# Altium PCB rl78l1a_smart_blood_pressure_monitor_pcb.PcbDoc
Units mm, origin at the board's own origin, x right, y up, seen from the top; angles counter-clockwise.
Board outline 98.42 x 85.72 mm, 2 copper layers (Top Layer, Bottom Layer); 60 components, 54 nets, 280 pads, 29 vias.
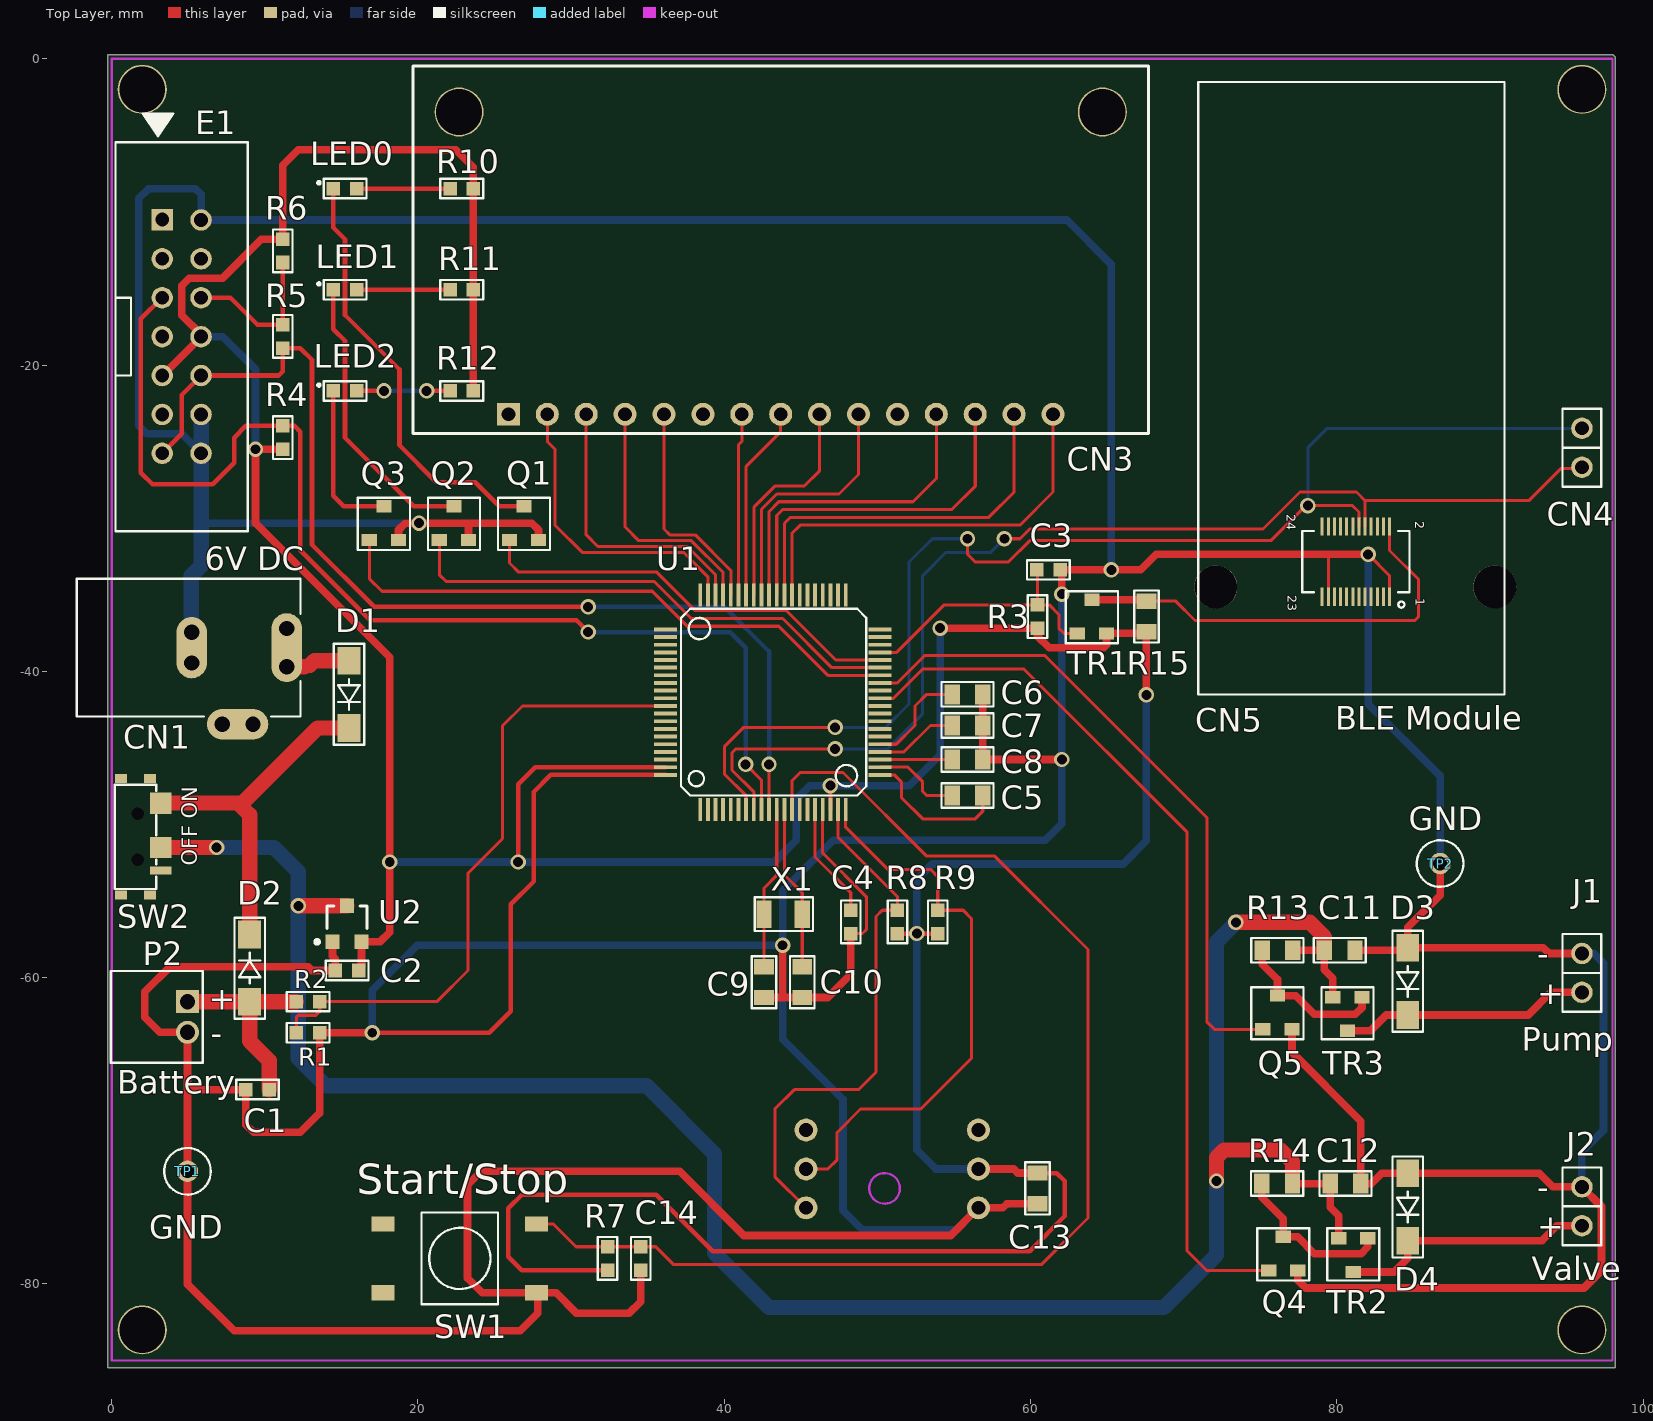
[diagram p0: Top Layer view]
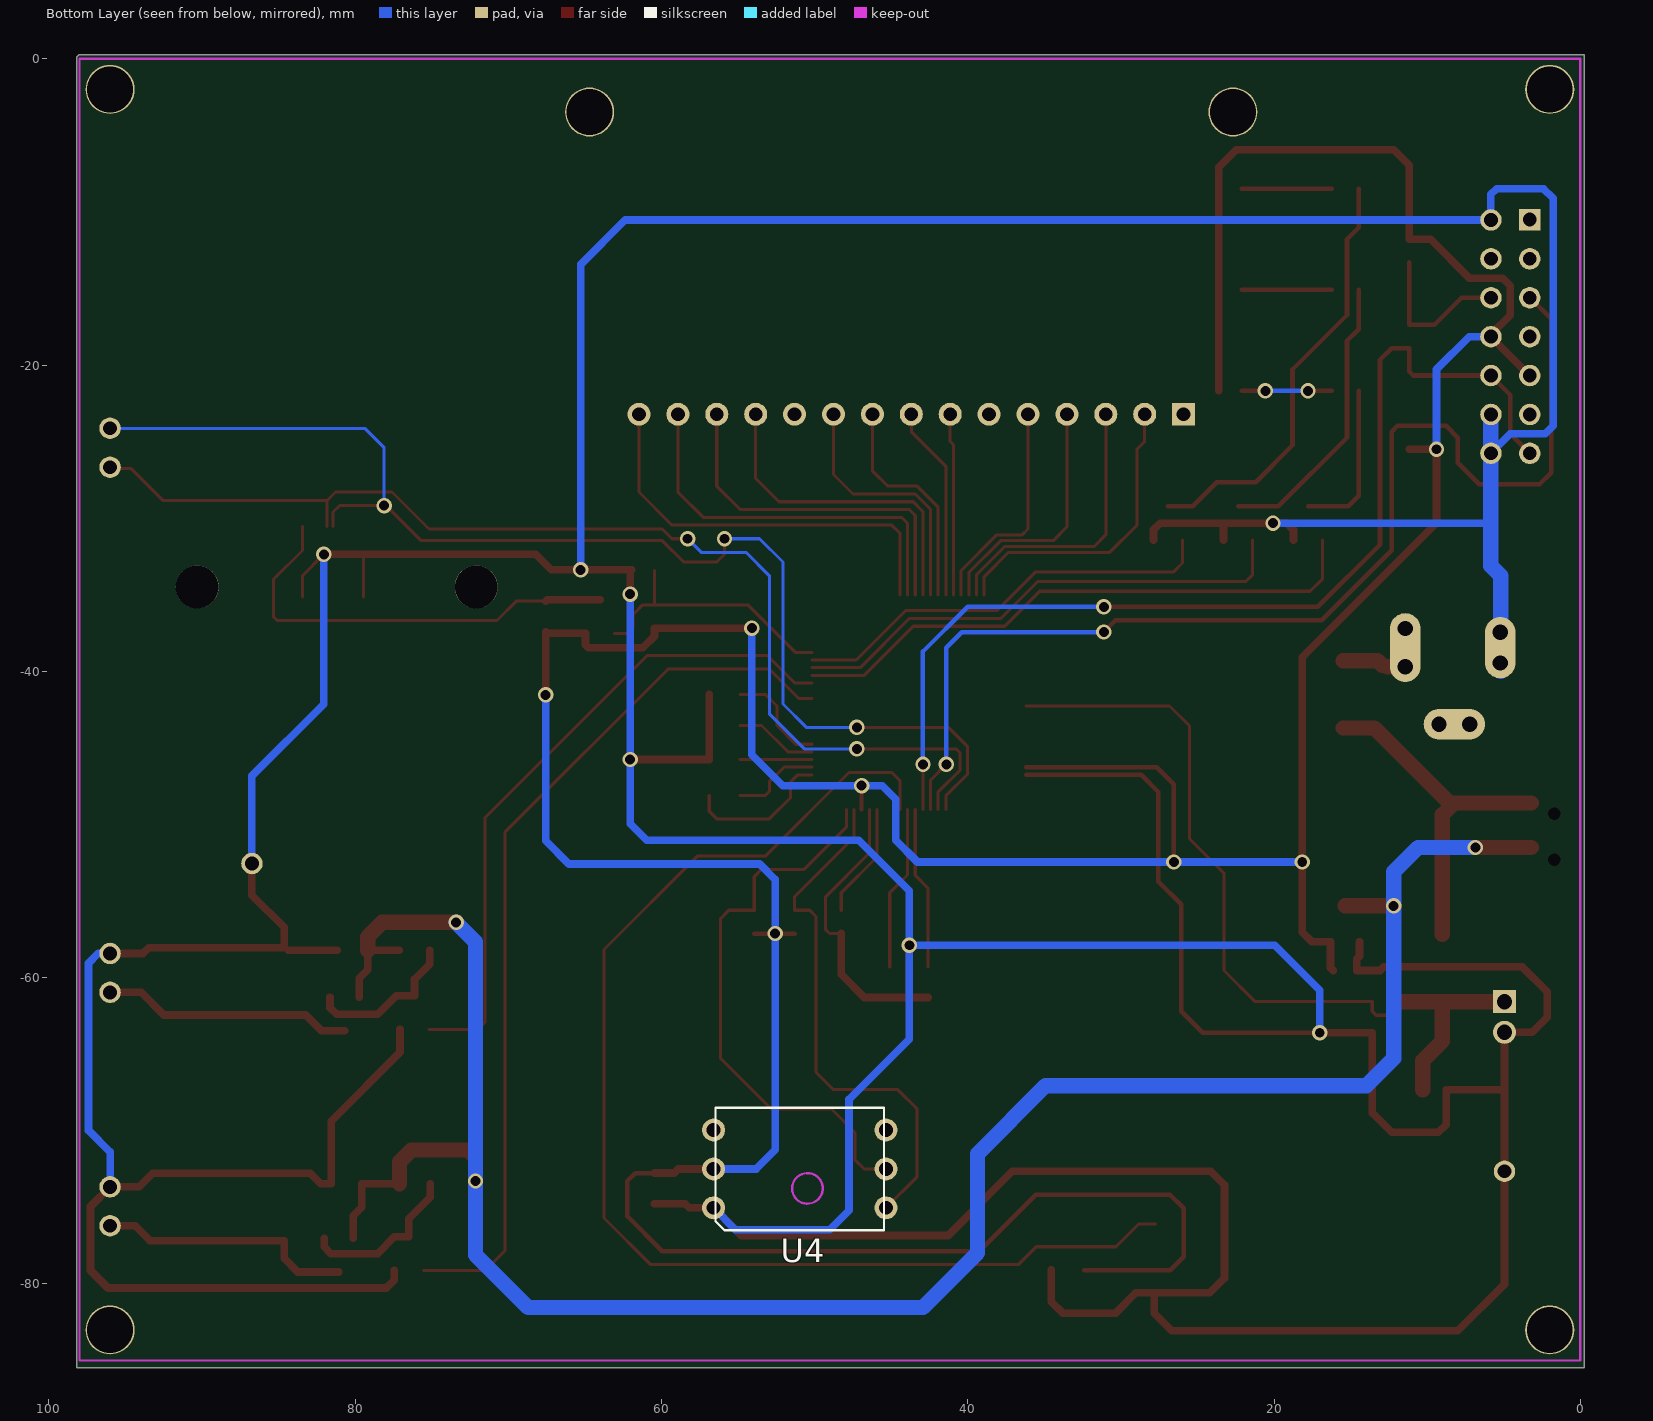
[diagram p1: Bottom Layer view, seen from below]

## Layer stack, top to bottom
Top Layer: signal copper 0.0356
Dielectric: dielectric 0.32, FR-4, Dk 4.8
Bottom Layer: signal copper 0.0356

## Board outline
-0.254,0 -0.254,-85.471 98.171,-85.471 98.171,-73.152 98.171,0.127 98.044,0.254 62.103,0.254 -0.254,0.254 -0.254,0

## Design rules (kind name [scope] priority, off if disabled: settings)
Clearance [All] p1: gap=0.15
ComponentClearance [All] p1: gap=0.254 collisioncheckmode=3 verticalgap=0.254
HoleSize [All] p1: absolutevalues=TRUE maxlimit=5 minlimit=0.025 maxpercent=80.000 minpercent=20.000
PolygonConnect [All] p1: connectstyle=Relief reliefconductorwidth=0.254 reliefentries=4 polygonreliefangle="90 Angle"
RoutingVias [All] p1: holewidth=0.65 width=1 viastyle="Through Hole" minholewidth=0.65 minwidth=1 maxholewidth=1 maxwidth=2
SolderMaskExpansion [All] p1: expansion=0.102
TestPointUsage [All] p1: valid=0 allowmultiple=FALSE
Testpoint [All] p1: side=15 testpointundercomponent=TRUE minsize=1.016 maxsize=2.54 preferedsize=1.524 minholesize=0 maxholesize=1.016 preferedholesize=0.813 testpointgrid=0.025 style=1023 order=0-112345678
Width [All] p1: maxlimit=1 minlimit=0.15 preferedwidth=0.254 toplayer_prefwidth=0.2 bottomlayer_prefwidth=0.2 minimp=50.000000 maximp=50.000000 favimp=50.000000
17 further rules are at their usual default settings.

## Classes and differential pairs
component class "Blood_Pressure_Monitor Sheet1": C1 C2 C3 C4 C5 C6 C7 C8 C9 C10 C14 CN1 D1 D2 E1 P2 R1 R2 R3 R4 R5 R6 R7 R8 R9 SW1 SW2 TR1 U1 U2 X1
component class "Blood_Pressure_Monitor Sheet2": C11 C12 C13 CN2 CN3 CN4 CN5 D3 D4 J1 J2 LED0 LED1 LED2 Q1 Q2 Q3 Q4 Q5 R10 R11 R12 R13 R14 R15 TP1 TP2 TP3 TP11 TP12 TR2 TR3 U4

## Components (designator, comment, footprint, x,y, rotation, side; value= is the part's Value field where it differs from the comment)
C1 "1uF" 0603 9.525,-67.31 r180 top
C2 "1uF" 0603 15.373,-59.534 r180 top
C3 "1uF" 0603 61.168,-33.372 r0 top
C4 "1uF" 0603 48.26,-56.359 r270 top
C5 "1uF" 0805 55.88,-48.104 r180 top
C6 "0.47uF" 0805 55.88,-41.5 r0 top
C7 "0.47uF" 0805 55.88,-43.532 r0 top
C8 "0.47uF" 0805 55.88,-45.758 r0 top
C9 "22pF" 0805 42.592,-60.296 r90 top
C10 "22pF" 0805 45.092,-60.296 r90 top
C11 "0.1uF" 0805 80.184,-58.207 r0 top
C12 "0.1uF" 0805 80.565,-73.447 r0 top
C13 "0.1uF" 0805 60.452,-73.758 r270 top
C14 "1uF" 0603 34.544,-78.33 r90 top
CN1 "DC IN" "POWER IN A" 11.43,-38.452 r0 top
CN3 "LCD 4x8" "LCD 4X8" 25.908,-23.212 r0 top
CN4 "CON 2PIN A" "JMP-2 A" 96,-25.4 r0 top
CN5 "Coaxial connector" "CRS5001 - 24" 90.932,-41.5 r270 top locked
D1 "1SS14" D1N 15.494,-41.5 r270 top
D2 "1SS14" D1N 9.017,-59.382 r90 top
D3 "1SS404" D1N 84.629,-60.239 r270 top
D4 "1SS404" D1N 84.629,-74.971 r270 top
E1 "CN2" "E8 Connect" 4.572,-18.132 r0 top
J1 "JMP 2PIN" "JMP-2 A" 96,-59.69 r0 top
J2 "JMP 2PIN" "JMP-2 A" 96,-74.93 r0 top
LED0 "" "LED 0603" 15.24,-8.48 r180 top
LED1 "" "LED 0603" 15.24,-15.084 r180 top
LED2 "" "LED 0603" 15.24,-21.688 r180 top
P2 "BAT AAAx4" CON-2MM-2 4.953,-61.566 r270 top
Q1 "DTC114" "SOT-23-3 A" 26.924,-30.324 r0 top
Q2 "DTC114" "SOT-23-3 A" 22.352,-30.324 r0 top
Q3 "DTC114" "SOT-23-3 A" 17.78,-30.324 r0 top
Q4 "DTC114" "SOT-23-3 A" 76.501,-78.019 r0 top
Q5 "DTC114" "SOT-23-3 A" 76.12,-62.271 r0 top
R1 "100K" 0603 12.827,-63.598 r0 top
R2 "100K" 0603 12.827,-61.566 r0 top
R3 "10K" 0603 60.452,-36.42 r90 top
R4 "1K" 0603 11.176,-24.736 r90 top
R5 "10K" 0603 11.176,-18.132 r90 top
R6 "1K" 0603 11.176,-12.544 r90 top
R7 "10K" 0603 32.385,-78.33 r90 top
R8 "4.7K" 0603 53.94,-56.359 r90 top
R9 "4.7K" 0603 51.308,-56.359 r90 top
R10 "1K" 0603 22.86,-8.48 r0 top
R11 "1K" 0603 22.86,-15.084 r0 top
R12 "1K" 0603 22.86,-21.688 r0 top
R13 "1K" 0805 76.12,-58.207 r0 top
R14 "1K" 0805 76.101,-73.447 r0 top
R15 "0" 0805 67.564,-36.42 r90 top
SW1 "Start/Stop" "KEY SMT (6 X 6)" 22.733,-78.33 r180 top
SW2 "SWITCH" "SW-1 C" 0.208,-50.8 r270 top
TP1 "" "TP A" 4.953,-72.644 r0 top
TP2 "" "TP A" 86.741,-52.549 r90 top
TR1 "SI2301" "SOT-23-3 B" 64.008,-36.42 r0 top
TR2 "IRLML6402" "SOT-23-3 B" 81.073,-78.119 r180 top
TR3 "IRLML6402" "SOT-23-3 B" 80.692,-62.371 r180 top
U1 "RL78_L1A_LQFP80" LQFP-80 43.18,-42.008 r0 top
U2 "XC6206-3.3V" SOT23A 15.367,-56.486 r0 top
U4 "ABP_HONEYWELL" ABP-DIP6 50.968,-72.49 r0 bottom locked
X1 "32.768K" "OSC 32K SMT" 43.842,-55.851 r180 top

## Footprints (in the part's own frame and the unit in brackets; to place one, negate y for a bottom-side part, rotate by r counter-clockwise, add the part's x,y. Pads: shape width x height; smd on the part's side, far side on the other; paste and mask are expansions set on the pad)
0603 [mil]
  rect 35x35 smd: 1(-30,0) 2(30,0)
  silkscreen extent -55,-25 55,25
0805 [mm]
  rect 1x1.3 smd: 1(-1,0) 2(1,0)
  silkscreen extent -1.7,-0.8 1.7,0.8
ABP-DIP6 [mm]
  round 1.5 hole 0.9: 1(5.625,2.54) 2(5.625,0) 3(5.625,-2.54) 4(-5.625,-2.54) 5(-5.625,0) 6(-5.625,2.54)
  Keep-Out Layer circle w0.15: c-0.5,1.27 r1
  silkscreen extent -5.5,-4 5.5,4
CON-2MM-2 [mm]
  rect 1.5x1.5 hole 1: 1(0,0)
  round 1.5 hole 1: 2(2,0)
  silkscreen extent -2,-5 4,1
"CRS5001 - 24" [mm]
  round 2.8 hole 2.8: 0(-7.011,-0.616) 0(-7.011,-18.841)
  rect 1.2x0.2 smd: 1(-6.361,-7.491) 2(-10.961,-7.491) 3(-6.361,-7.891) 4(-10.961,-7.891) 5(-6.361,-8.291) 6(-10.961,-8.291) 7(-6.361,-8.691) 8(-10.961,-8.691) 9(-6.361,-9.091) 10(-10.961,-9.091) 11(-6.361,-9.491) 12(-10.961,-9.491) 13(-6.361,-9.891) 14(-10.961,-9.891) 15(-6.361,-10.291) 16(-10.961,-10.291) 17(-6.361,-10.691) 18(-10.961,-10.691) 19(-6.361,-11.091) 20(-10.961,-11.091) 21(-6.361,-11.491) 22(-10.961,-11.491) 23(-6.361,-11.891) 24(-10.961,-11.891)
  silkscreen extent -39.99,-19.99 0.01,0.01
D1N [mm]
  rect 1.8x1.5 smd: A(-2.2,0) K(2.2,0)
  silkscreen extent -3.3,-1 3.3,1
"E8 Connect" [mm]
  rect 1.4x1.4 hole 0.9: 1(-1.27,7.633)
  round 1.4 hole 0.9: 2(1.27,7.607) 3(-1.27,5.067) 4(1.27,5.067) 5(-1.27,2.527) 6(1.27,2.527) 7(-1.27,-0.013) 8(1.27,-0.013) 9(-1.27,-2.553) 10(1.27,-2.553) 11(-1.27,-5.093) 12(1.27,-5.093) 13(-1.27,-7.633) 14(1.27,-7.633)
  silkscreen extent -4.32,-12.71 4.32,14.56
"JMP-2 A" [mm]
  round 1.4 hole 0.9: 1(0,-1.27) 2(0,1.27)
  silkscreen extent -1.27,-2.54 1.27,2.54
"KEY SMT (6 X 6)" [mm]
  rect 1.5x1 smd: 1(-5,2.25) 2(-5,-2.25) 3(5,-2.25) 4(5,2.25)
  silkscreen extent -2.5,-3 2.5,3
"LCD 4X8" [mm]
  rect 1.5x1.5 hole 0.9: 1(0,0)
  round 1.5 hole 0.9: 2(2.54,0) 3(5.08,0) 4(7.62,0) 5(10.16,0) 6(12.7,0) 7(15.24,0) 8(17.78,0) 9(20.32,0) 10(22.86,0) 11(25.4,0) 12(27.94,0) 13(30.48,0) 14(33.02,0) 15(35.56,0)
  round 3.2 hole 3: ""(-3.223,19.733) ""(38.783,19.733)
  silkscreen extent -6.22,-1.27 41.78,22.73
"LED 0603" [mil]
  rect 35x35 smd: A(-30,0) K(30,0)
  silkscreen extent -55,-25 69,25
LQFP-80 [mm]
  rect 0.25x1.5 smd: 1(-4.75,-7) 2(-4.25,-7) 3(-3.75,-7) 4(-3.25,-7) 5(-2.75,-7) 6(-2.25,-7) 7(-1.75,-7) 8(-1.25,-7) 9(-0.75,-7) 10(-0.25,-7) 11(0.25,-7) 12(0.75,-7) 13(1.25,-7) 14(1.75,-7) 15(2.25,-7) 16(2.75,-7) 17(3.25,-7) 18(3.75,-7) 19(4.25,-7) 20(4.75,-7) 41(4.75,7) 42(4.25,7) 43(3.75,7) 44(3.25,7) 45(2.75,7) 46(2.25,7) 47(1.75,7) 48(1.25,7) 49(0.75,7) 50(0.25,7) 51(-0.25,7) 52(-0.75,7) 53(-1.25,7) 54(-1.75,7) 55(-2.25,7) 56(-2.75,7) 57(-3.25,7) 58(-3.75,7) 59(-4.25,7) 60(-4.75,7)
  rect 1.5x0.25 smd: 21(7,-4.75) 22(7,-4.25) 23(7,-3.75) 24(7,-3.25) 25(7,-2.75) 26(7,-2.25) 27(7,-1.75) 28(7,-1.25) 29(7,-0.75) 30(7,-0.25) 31(7,0.25) 32(7,0.75) 33(7,1.25) 34(7,1.75) 35(7,2.25) 36(7,2.75) 37(7,3.25) 38(7,3.75) 39(7,4.25) 40(7,4.75) 61(-7,4.75) 62(-7,4.25) 63(-7,3.75) 64(-7,3.25) 65(-7,2.75) 66(-7,2.25) 67(-7,1.75) 68(-7,1.25) 69(-7,0.75) 70(-7,0.25) 71(-7,-0.25) 72(-7,-0.75) 73(-7,-1.25) 74(-7,-1.75) 75(-7,-2.25) 76(-7,-2.75) 77(-7,-3.25) 78(-7,-3.75) 79(-7,-4.25) 80(-7,-4.75)
  silkscreen extent -6,-6.1 6.1,6.1
"OSC 32K SMT" [mm]
  rect 1x1.8 smd: 1(-1.25,0) 2(1.25,0)
  silkscreen extent -1.95,-1.1 1.85,1.1
"POWER IN A" [mm]
  oval 2x4.5 all layers, no hole: 1(0,0)
  round 1.5 hole 1: 1A(0,-1.25) 1B(0,1.25) 2A(-6.2,-1) 2B(-6.2,1) 3A(-4.2,-5) 3B(-2.2,-5)
  oval 2x4 all layers, no hole: 2(-6.2,0)
  oval 4x2 all layers, no hole: 3(-3.2,-5)
  silkscreen extent -13.7,-4.5 0.9,4.5
SOT23A [mm]
  rect 0.9x0.95 smd: 1(-0.95,-1.175) 2(0.95,-1.175) 3(0,1.175)
  silkscreen extent -2.07,-1.3 1.3,1.18
"SOT-23-3 A" [mm]
  rect 1x0.8 smd: B(-0.95,-1.1) C(0,1.1) E(0.95,-1.1)
  silkscreen extent -1.7,-1.75 1.7,1.65
"SOT-23-3 B" [mm]
  rect 1x0.8 smd: 1(-0.95,-1.1) 2(0.95,-1.1) 3(0,1.1)
  silkscreen extent -1.7,-1.75 1.7,1.65
"SW-1 C" [mm]
  rect 0.6x0.8 smd: 0(-3.8,2.3) 0(-3.8,0.4) 0(3.8,2.3) 0(3.8,0.4)
  rect 0x0 hole 0.8: 0(-1.5,1.5) 0(1.5,1.5)
  rect 1.4x1.4 smd: 1(-2.2,3) 2(0.7,3)
  rect 0.5x1.4 smd: 3(2.2,3)
  silkscreen extent -3.4,0 3.41,2.7
"TP A" [mm]
  round 1.4 hole 0.9: 1(0,0)
  silkscreen extent -1.52,-1.52 1.52,1.52

## Part data
C1 C2 C3 C4 C5 C6 C7 C8 C9 C10 C11 C12 C13 C14: library part CAP
CN1: library part "Coaxial connector"
D1 D2: library part 1SS404
E1: library part E1
LED0 LED1 LED2: library part LED
P2: library part "Cell Battery", "Header, 4-Pin"
R1 R2 R3 R4 R5 R6 R7 R8 R9 R10 R11 R12 R13 R14 R15: library part RES
SW1: library part SW-PB, "Switch"
TP1 TP2: library part TP
TR1: library part PL2301
TR2 TR3: library part IRLML5103
U2: library part XC6206
X1: library part "OSC 2PIN"

## Free pads (board coordinates)
  round 3.2 hole 3: 0(2,-83) 1(96,-83) 2(96,-2) 3(2,-2)

## Via types
v1: diameter 1, hole 0.65, Top Layer to Bottom Layer, 29 vias

## Nets (pads, with @x,y where several pads share a name; then routed paths per layer and width w, separated by ;. In a path a pad name is that pad's centre, name@x,y a point inside that pad or via, vN(x,y) a via of type N, cw(c..) or ccw(c..) an arc to the next point about the centre after c; other vN are vias at no path point)
+3.3V: C2.1 C13.1 E1.8 E1.9 R3.1 R4.1 R6.2 R7.1 R8.1 R9.1 R10.2 R11.2 R12.2 R15.1 TR1.2 U1.18 U1.79 U2.2 U4.2 | length 291.1
  Top Layer w0.254: U1.18 v1(46.93,-47.465)
  Top Layer w0.3: v1(26.543,-52.451) 26.543,-47.371 27.656,-46.258 U1.79 ; R7.1 26.768,-79.092 25.908,-78.232 25.908,-75.057 26.797,-74.168 35.56,-74.168 39.243,-77.851 59.944,-77.851 62.23,-75.565 62.23,-73.279 61.709,-72.758 C13.1 ; R9.1 R8.1
  Top Layer w0.5: E1.9 E1.8 5.842,-18.005 4.572,-16.735 4.572,-14.83 5.08,-14.322 7.239,-14.322 9.779,-11.782 R6.2 11.176,-6.956 12.192,-5.94 22.479,-5.94 23.622,-7.083 R12.2 ; R4.1 v1(9.398,-25.498) 9.398,-30.324 18.161,-39.087 18.161,-57.023 17.523,-57.661 U2.2 16.317,-59.352 C2.1 ; v1(54.102,-37.182) R3.1 60.452,-37.69 61.214,-38.452 64.77,-38.452 64.958,-38.264 TR1.2 67.464,-37.52 R15.1 v1(67.564,-41.529) ; U4.2 58.901,-72.49 59.169,-72.758 C13.1
  Bottom Layer w0.5: E1.8 7.252,-18.145 9.398,-20.291 v1(9.398,-25.498) ; v1(18.161,-52.451) 43.278,-52.451 ; 43.313,-52.416 44.704,-51.025 44.704,-48.358 45.597,-47.465 52.074,-47.465 54.102,-45.437 v1(54.102,-37.182) ; U4.2 53.821,-72.49 52.578,-71.247 52.578,-53.594 53.594,-52.578 66.04,-52.578 67.564,-51.054 v1(67.564,-41.529)
  other v1: 52.578,-57.121
+6V: C11.1 C12.1 R13.2 R14.2 SW2.2 TR2.2 TR3.2 U2.3 | length 146.3
  Top Layer w0.5: R14.2 C12.1 79.565,-74.987 80.123,-75.545 TR2.2 ; R13.2 C11.1 79.184,-59.493 79.742,-60.051 TR3.2
  Top Layer w1: SW2.2 v1(6.858,-51.5) ; v1(12.192,-55.311) U2.3 ; v1(72.136,-73.279) 72.136,-71.755 72.644,-71.247 76.327,-71.247 77.101,-72.021 R14.2 ; v1(73.406,-56.388) 78.232,-56.388 79.184,-57.34 C11.1
  Bottom Layer w1: v1(6.858,-51.5) 10.606,-51.5 12.192,-53.086 12.192,-65.278 13.97,-67.056 34.925,-67.056 39.37,-71.501 39.37,-77.978 42.926,-81.534 68.707,-81.534 72.136,-78.105 72.136,-57.658 v1(73.406,-56.388)
AD1: R1.1 R2.2 U1.71 | length 42
  Top Layer w0.2: R1.1 12.065,-62.582 12.192,-62.455 13.335,-62.455 13.589,-62.201 R2.2 21.238,-61.566 23.27,-59.534 23.27,-53.184 25.527,-50.927 25.527,-43.561 26.83,-42.258 U1.71
BT_EN: C3.1 R3.2 TR1.1 U1.37 | length 17.7
  Top Layer w0.2: U1.37 51.256,-38.758 54.356,-35.658 61.214,-35.658 61.849,-36.293 61.849,-37.182 62.187,-37.52 TR1.1 ; R3.2 C3.1@60.452,-33.418
BT_VDD: CN5.2 R15.2 TR1.3 | length 28.7
  Top Layer w0.2: R15.2 69.485,-35.42 70.739,-36.674 85.09,-36.674 85.344,-36.42 85.344,-34.007 83.441,-32.104 CN5.2
  Top Layer w0.5: TR1.3 67.464,-35.32 R15.2
CAPH: C5.1 U1.21 | length 9.7
  Top Layer w0.2: U1.21 51.105,-46.758 51.562,-47.215 51.562,-48.231 52.959,-49.628 56.388,-49.628 56.88,-49.136 C5.1
CAPL: C5.2 U1.22 | length 5.8
  Top Layer w0.2: U1.22 52.002,-46.258 52.959,-47.215 52.959,-47.85 53.213,-48.104 C5.2
COM0: CN3.12 U1.51 | length 21.5
  Top Layer w0.2: U1.51 42.93,-29.558 43.561,-28.927 52.324,-28.927 53.848,-27.403 CN3.12
COM1: CN3.13 U1.50 | length 23.6
  Top Layer w0.2: U1.50 43.43,-29.82 43.815,-29.435 54.864,-29.435 56.388,-27.911 CN3.13
COM2: CN3.14 U1.49 | length 25.6
  Top Layer w0.2: U1.49 43.93,-30.336 44.323,-29.943 57.277,-29.943 58.928,-28.292 CN3.14
COM3: CN3.15 U1.48 | length 27.3
  Top Layer w0.2: U1.48 44.43,-30.979 44.958,-30.451 59.309,-30.451 61.468,-28.292 CN3.15
GND: C1.2 C2.2 C3.2 C4.2 C6.2 C7.2 C8.2 C9.1 C10.1 C11.2 C12.2 C13.2 C14.1 CN1.2 CN5.1 CN5.21 D3.A D4.A E1.2 E1.12 E1.14 J1.2 J2.2 P2.2 Q1.E Q2.E Q3.E Q4.E Q5.E R1.2 SW1.1 TP1.1 TP2.1 U1.17 U1.80 U2.1 U4.1 | length 599
  Top Layer w0.2: U1.17 46.43,-51.862 49.276,-54.708 49.276,-56.867 49.022,-57.121 C4.2 ; CN5.21 79.441,-32.417 79.502,-32.356 ; v1(82.042,-32.356) 83.441,-33.755 CN5.1
  Top Layer w0.3: v1(17.018,-63.598) 24.667,-63.598 26.064,-62.201 26.064,-55.216 27.559,-53.721 27.559,-47.879 28.68,-46.758 U1.80
  Top Layer w0.5: 4.953,-67.31 C1.2@8.525,-67.31 ; C1.2 8.763,-69.596 9.271,-70.104 12.319,-70.104 13.589,-68.834 R1.2 v1(17.018,-63.598) ; U2.1 14.417,-58.584 14.611,-58.778 C2.2 13.081,-59.534 12.827,-59.28 3.81,-59.28 2.159,-60.931 2.159,-62.582 3.143,-63.566 P2.2 4.953,-80.01 8.001,-83.058 26.67,-83.058 27.813,-81.915 SW1.1@27.813,-80.66 ; Q3.E 18.73,-30.771 19.177,-30.324 27.432,-30.324 27.874,-30.766 Q1.E ; Q2.E 23.302,-30.385 ; C14.1 34.544,-81.153 33.782,-81.915 30.353,-81.915 29.018,-80.58 24.192,-80.58 23.241,-79.629 23.241,-73.533 24.13,-72.644 37.084,-72.644 41.275,-76.835 54.788,-76.835 U4.1 58.193,-75.03 58.465,-74.758 C13.2 ; C9.1 46.752,-61.296 48.26,-59.788 C4.2 ; 43.815,-61.169 v1(43.815,-57.883) ; C6.2 C8.2 v1(62.043,-45.758) ; C3.2 67.183,-33.372 68.199,-32.356 v1(82.042,-32.356) ; v1(62.043,-34.963) C3.2@62.043,-33.485 ; Q5.E 77.07,-64.872 81.565,-69.367 C12.2 82.255,-73.447 82.931,-72.771 93.218,-72.771 94.107,-73.66 J2.2 97.282,-74.942 97.282,-79.121 96.139,-80.264 77.959,-80.264 77.451,-79.756 Q4.E ; C11.2 D3.A@84.369,-58.207 ; TP2.1 86.741,-54.61 84.629,-56.722 D3.A 93.472,-58.039 93.853,-58.42 J1.2
  Bottom Layer w0.5: 5.842,-30.324 v1(20.066,-30.324) ; E1.14@5.842,-25.752 4.572,-24.482 2.286,-24.482 1.778,-23.974 1.778,-9.115 2.413,-8.48 5.461,-8.48 5.842,-8.861 E1.2 62.37,-10.525 65.278,-13.433 v1(65.278,-33.372) ; v1(17.018,-63.598) 17.018,-60.833 19.968,-57.883 v1(43.815,-57.883) ; U4.1 55.169,-76.454 49.022,-76.454 47.752,-75.184 47.752,-67.945 43.815,-64.008 43.815,-54.327 47.117,-51.025 60.96,-51.025 62.043,-49.942 v1(62.043,-34.963) ; v1(82.042,-32.356) 82.042,-42.135 86.741,-46.834 TP2.1 ; J2.2 96,-71.386 97.409,-69.977 97.409,-59.055 96.774,-58.42 J1.2
  Bottom Layer w1: CN1.2@5.207,-40 5.207,-33.753 5.842,-33.118 E1.12
KEY0: C14.2 R7.2 SW1.2 U1.13 | length 82.1
  Top Layer w0.2: SW1.2 28.836,-76.08 30.324,-77.568 35.531,-77.568 36.703,-78.74 60.706,-78.74 63.754,-75.692 63.754,-58.166 57.658,-52.07 53.213,-52.07 47.752,-46.609 44.958,-46.609 44.43,-47.137 U1.13
LED0: Q1.B U1.36 | length 28.3
  Top Layer w0.2: Q1.B 25.974,-32.93 26.543,-33.499 35.56,-33.499 38.1,-36.039 44.069,-36.039 47.288,-39.258 U1.36
LED1: Q2.B U1.35 | length 33.6
  Top Layer w0.2: Q2.B 21.402,-33.692 21.844,-34.134 35.433,-34.134 37.846,-36.547 43.815,-36.547 47.026,-39.758 U1.35
LED2: Q3.B U1.34 | length 38.5
  Top Layer w0.2: Q3.B 16.83,-33.946 17.653,-34.769 35.306,-34.769 37.592,-37.055 43.561,-37.055 46.764,-40.258 U1.34
NetC1_1: C1.1 D2.A P2.1 R2.1 | length 13.4
  Top Layer w1: P2.1 R2.1 ; D2.A@9.001,-61.566 D2.A 9.017,-64.135 10.287,-65.405 C1.1
NetC4_1: C4.1 U1.16 | length 7.6
  Top Layer w0.2: U1.16 45.93,-52.124 48.26,-54.454 C4.1
NetCN1_1: CN1.1 D1.A | length 4.9
  Top Layer w1: CN1.1@11.43,-38.602 11.43,-39.702 12.58,-39.702 ; 12.954,-39.595 13.249,-39.3 D1.A
NetD1_K: D1.K D2.K SW2.1 | length 23
  Top Layer w1: SW2.1 8.55,-48.6 13.45,-43.7 D1.K ; 8.255,-48.6 9.017,-49.362 9.017,-54.61 ; D2.K 9.017,-54.835
NetD3_K: D3.K J1.1 TR3.3 | length 16.3
  Top Layer w0.5: TR3.3 82.198,-63.471 83.23,-62.439 92.501,-62.439 93.98,-60.96 J1.1
NetD4_K: D4.K J2.1 TR2.3 | length 16.9
  Top Layer w0.5: TR2.3 83.74,-79.219 84.629,-78.33 D4.K 93.39,-77.171 94.361,-76.2 J2.1
NetE1_6: E1.6 R5.2 R6.1 | length 10.1
  Top Layer w0.3: E1.6 7.76,-15.605 9.525,-17.37 R5.2 R6.1
NetLED0_A: LED0.A R10.1 | length 5.9
  Top Layer w0.3: LED0.A@16.24,-8.48 R10.1
NetLED0_K: LED0.K Q1.C | length 28.3
  Top Layer w0.3: LED0.K 14.478,-11.02 15.24,-11.782 15.24,-16.735 18.796,-20.291 18.796,-25.244 21.209,-27.657 23.749,-27.657 25.316,-29.224 Q1.C
NetLED1_A: LED1.A R11.1 | length 5.9
  Top Layer w0.3: LED1.A@16.24,-15.084 R11.1
NetLED1_K: LED1.K Q2.C | length 18.9
  Top Layer w0.3: LED1.K 14.478,-17.653 15.24,-18.415 15.24,-24.736 19.728,-29.224 Q2.C
NetLED2_A: LED2.A R12.1 | length 5.9
  Top Layer w0.3: LED2.A@16.24,-21.688 v1(17.78,-21.688) ; v1(20.574,-21.688) R12.1
  Bottom Layer w0.3: v1(17.78,-21.688) v1(20.574,-21.688)
NetLED2_K: LED2.K Q3.C | length 10.4
  Top Layer w0.3: LED2.K 14.478,-28.546 15.156,-29.224 Q3.C
NetQ4_C: Q4.C R14.1 TR2.1 | length 10.8
  Top Layer w0.5: R14.1 75.101,-74.333 76.501,-75.733 Q4.C 77.433,-76.919 78.533,-78.019 81.581,-78.019 82.023,-77.577 TR2.1
NetQ5_C: Q5.C R13.1 TR3.1 | length 10.3
  Top Layer w0.5: R13.1 75.12,-59.112 76.12,-60.112 Q5.C 77.306,-61.171 78.533,-62.398 81.2,-62.398 81.642,-61.956 TR3.1
P40/TOOL0: E1.5 R4.2 U1.9 | length 75.9
  Top Layer w0.2: v1(41.402,-46.072) 42.43,-47.1 U1.9
  Top Layer w0.3: E1.5 3.289,-15.605 1.905,-16.989 1.905,-27.022 2.667,-27.784 6.604,-27.784 8.001,-26.387 8.001,-24.736 8.763,-23.974 11.938,-23.974 12.319,-24.355 12.319,-32.102 16.891,-36.674 30.353,-36.674 v1(31.115,-37.436)
  Bottom Layer w0.3: v1(31.115,-37.436) 40.386,-37.436 41.402,-38.452 v1(41.402,-46.072)
P123/XT1: C10.2 U1.12 X1.1 | length 10.8
  Top Layer w0.2: U1.12 43.93,-53.299 45.092,-54.461 C10.2
P124/XT2: C9.2 U1.11 X1.2 | length 10.6
  Top Layer w0.2: C9.2 42.592,-54.153 43.43,-53.315 U1.11
PUMP_CTRL: Q5.B U1.33 | length 43.7
  Top Layer w0.2: U1.33 51.288,-40.758 53.086,-38.96 60.931,-38.96 71.513,-49.542 71.513,-62.877 72.007,-63.371 Q5.B
RESET: E1.10 E1.13 R5.1 U1.10 | length 70.4
  Top Layer w0.2: U1.10 v1@42.93,-46.076
  Top Layer w0.3: E1.13 3.302,-25.752 4.572,-24.482 4.572,-21.955 E1.10 10.909,-20.685 11.176,-20.418 R5.1 12.319,-18.894 13.081,-19.656 13.081,-31.721 17.145,-35.785 v1(31.115,-35.785)
  Bottom Layer w0.3: v1(31.115,-35.785) 40.005,-35.785 42.926,-38.706 v1(42.926,-46.072)
RESET_2: CN5.5
RXD: CN4.2 CN5.12 U1.7 | length 83.2
  Top Layer w0.2: U1.7 41.43,-48.132 40.005,-46.707 40.005,-44.929 41.275,-43.659 v1(47.244,-43.659) ; v1(55.88,-31.34) 55.88,-32.356 56.388,-32.864 58.547,-32.864 59.944,-31.467 75.692,-31.467 77.978,-29.181 81.026,-29.181 81.441,-29.596 CN5.12
  Bottom Layer w0.2: v1(47.244,-43.659) 50.546,-43.659 52.07,-42.135 52.07,-32.864 53.594,-31.34 v1(55.88,-31.34) ; v1(78.105,-29.181) 78.105,-25.4 79.375,-24.13 CN4.2@96.012,-24.13
SCL: R9.2 U1.19 U4.6 | length 34.8
  Top Layer w0.2: U4.6 43.307,-72.994 43.307,-68.58 44.577,-67.31 48.768,-67.31 49.911,-66.167 49.911,-56.007 50.321,-55.597 R9.2 51.308,-54.708 47.43,-50.83 U1.19
SDA: R8.2 U1.20 U4.5 | length 37.1
  Top Layer w0.2: U4.5 46.763,-72.49 47.371,-71.882 47.371,-70.104 48.895,-68.58 52.832,-68.58 56.134,-65.278 56.134,-56.134 55.597,-55.597 R8.2 53.94,-53.403 53.467,-52.93 50.673,-52.93 47.93,-50.187 U1.20
SEG0: CN3.2 U1.59 | length 20
  Top Layer w0.2: CN3.2 28.448,-24.99 28.956,-25.498 28.956,-30.451 30.734,-32.229 37.338,-32.229 38.93,-33.821 U1.59
SEG1: CN3.3 U1.58 | length 18.7
  Top Layer w0.2: CN3.3 30.988,-31.086 31.75,-31.848 37.592,-31.848 39.43,-33.686 U1.58
SEG2: CN3.4 U1.57 | length 16.5
  Top Layer w0.2: CN3.4 33.528,-30.578 34.417,-31.467 37.846,-31.467 39.93,-33.551 U1.57
SEG3: CN3.5 U1.56 | length 14.6
  Top Layer w0.2: CN3.5 36.068,-30.705 36.449,-31.086 38.1,-31.086 40.43,-33.416 U1.56
SEG4: CN3.7 U1.55 | length 11.9
  Top Layer w0.2: U1.55 40.93,-25.208 41.148,-24.99 CN3.7
SEG5: CN3.8 U1.54 | length 12.7
  Top Layer w0.2: U1.54 41.43,-26.613 43.688,-24.355 CN3.8
SEG6: CN3.9 U1.53 | length 14.7
  Top Layer w0.2: U1.53 41.93,-29.288 43.307,-27.911 45.212,-27.911 46.228,-26.895 CN3.9
SEG7: CN3.10 U1.52 | length 16.8
  Top Layer w0.2: U1.52 42.43,-29.423 43.434,-28.419 47.498,-28.419 48.768,-27.149 CN3.10
TOOL0_2: CN5.3
TXD: CN4.1 CN5.10 U1.8 | length 74.9
  Top Layer w0.2: U1.8 41.93,-47.87 40.513,-46.453 40.513,-45.31 40.767,-45.056 v1(47.244,-45.056) ; v1(58.293,-31.34) 59.309,-31.34 59.944,-30.705 75.184,-30.705 77.597,-28.292 81.28,-28.292 81.841,-28.853 ; CN5.10 81.841,-28.853 ; CN4.1@96.012,-26.67 95.914,-26.768 94.615,-26.768 92.53,-28.853 81.841,-28.853
  Bottom Layer w0.2: v1(47.244,-45.056) 50.673,-45.056 52.959,-42.77 52.959,-33.753 54.483,-32.229 57.404,-32.229 v1(58.293,-31.34)
VALVE_CTRL: Q4.B U1.31 | length 58.4
  Top Layer w0.2: U1.31 51.05,-41.758 52.959,-39.849 59.563,-39.849 70.224,-50.51 70.224,-77.844 71.499,-79.119 Q4.B
VL1: C8.1 U1.23 | length 4.7
  Top Layer w0.2: U1.23 C8.1
VL2: C7.1 U1.24 | length 5.4
  Top Layer w0.2: U1.24 51.741,-45.258 53.467,-43.532 C7.1
VL4: C6.1 U1.25 | length 6.8
  Top Layer w0.2: U1.25 51.225,-44.758 52.451,-43.532 52.451,-42.262 53.213,-41.5 C6.1
pads on no net: CN1.1A CN1.1B CN1.2A CN1.2B CN1.3 CN1.3A CN1.3B CN3. CN3.1 CN3.6 CN3.11 CN5.0 CN5.4 CN5.6 CN5.7 CN5.8 CN5.9 CN5.11 CN5.13 CN5.14 CN5.15 CN5.16 CN5.17 CN5.18 CN5.19 CN5.20 CN5.22 CN5.23 CN5.24 E1.1 E1.3 E1.4 E1.7 E1.11 SW1.3 SW1.4 SW2.0 SW2.3 U1.1 U1.2 U1.3 U1.4 U1.5 U1.6 U1.14 U1.15 U1.26 U1.27 U1.28 U1.29 U1.30 U1.32 U1.38 U1.39 U1.40 U1.41 U1.42 U1.43 U1.44 U1.45 U1.46 U1.47 U1.60 U1.61 U1.62 U1.63 U1.64 U1.65 U1.66 U1.67 U1.68 U1.69 U1.70 U1.72 U1.73 U1.74 U1.75 U1.76 U1.77 U1.78 U4.3 U4.4

## Keep-outs
Keep-Out Layer:
  lines w0.15: 0,-85 98,-85 98,0 0,0 0,-85

## Silkscreen, mask and mechanical layers (free items; w line width, h text height)
Top Overlay:
  text "6V DC" at 6.096,-33.401 h1.52
  text "BLE Module" at 79.883,-43.815 h1.52
  text "GND" at 84.709,-50.39 h1.52
  text "OFF ON" at 5.588,-52.705 h1 r90
  text "-" at 93.091,-59.182 h1.52
  text "+" at 93.091,-61.722 h1.52
  text "+" at 6.35,-62.103 h1.52
  text "-" at 6.477,-64.389 h1.52
  text "Pump" at 92.075,-64.77 h1.52
  text "Battery" at 0.381,-67.564 h1.52
  text "Start/Stop" at 16.002,-74.139 h2
  text "-" at 93.091,-74.422 h1.52
  text "+" at 93.091,-76.962 h1.52
  text "GND" at 2.46,-77.06 h1.52
  text "Valve" at 92.71,-79.756 h1.52

## Text inside footprints (layer, text, board x,y; h text height)
CN1: Mechanical 1 "Mech 2 - Clearance, move to internal plane if present" at -1.984,-33.386 h0.3; Mechanical 1 "Mech 1 - Slot cut-out" at -1.984,-32.886 h0.3; Mechanical 1 "Assign keep-out area to slot" at -1.984,-31.886 h0.3; Mechanical 1 "Alert PCB fab to slot details" at -1.984,-32.386 h0.3
CN5: Top Overlay "24" at 76.741,-29.739 h0.6 r270; Top Overlay "23" at 76.791,-35.039 h0.6 r270; Top Overlay "2" at 85.116,-30.189 h0.6 r270; Top Overlay "1" at 85.166,-35.214 h0.6 r270